# Altium PCB PCB_Base.PcbDoc
Units mm, origin at the board's own origin, x right, y up, seen from the top; angles counter-clockwise.
Board outline 290.83 x 119.38 mm, 2 copper layers (Top Layer, Bottom Layer); 6 components, 196 nets, 6 pads, 0 vias.
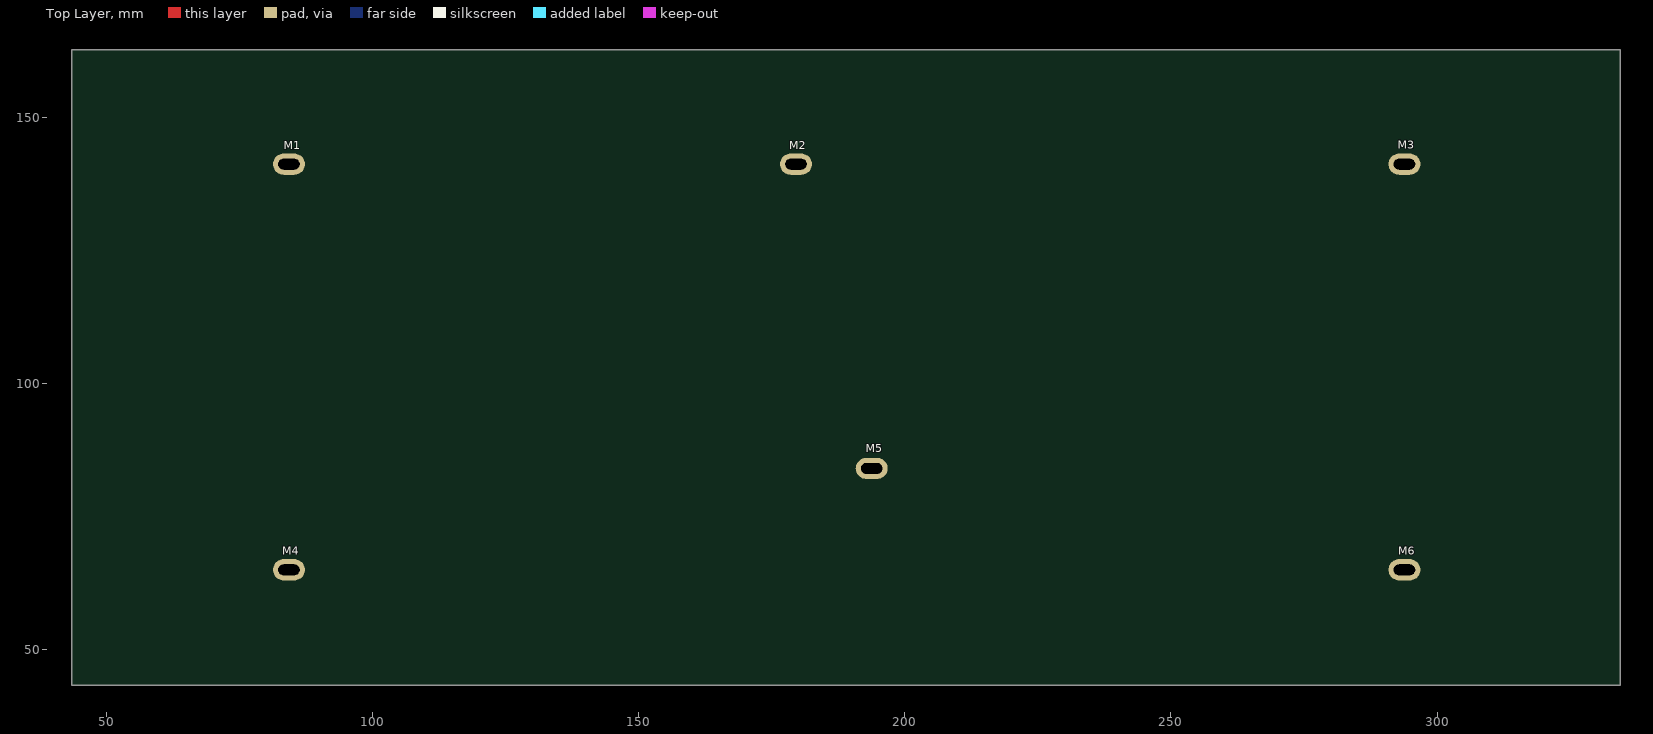
[diagram p0: Top Layer view]
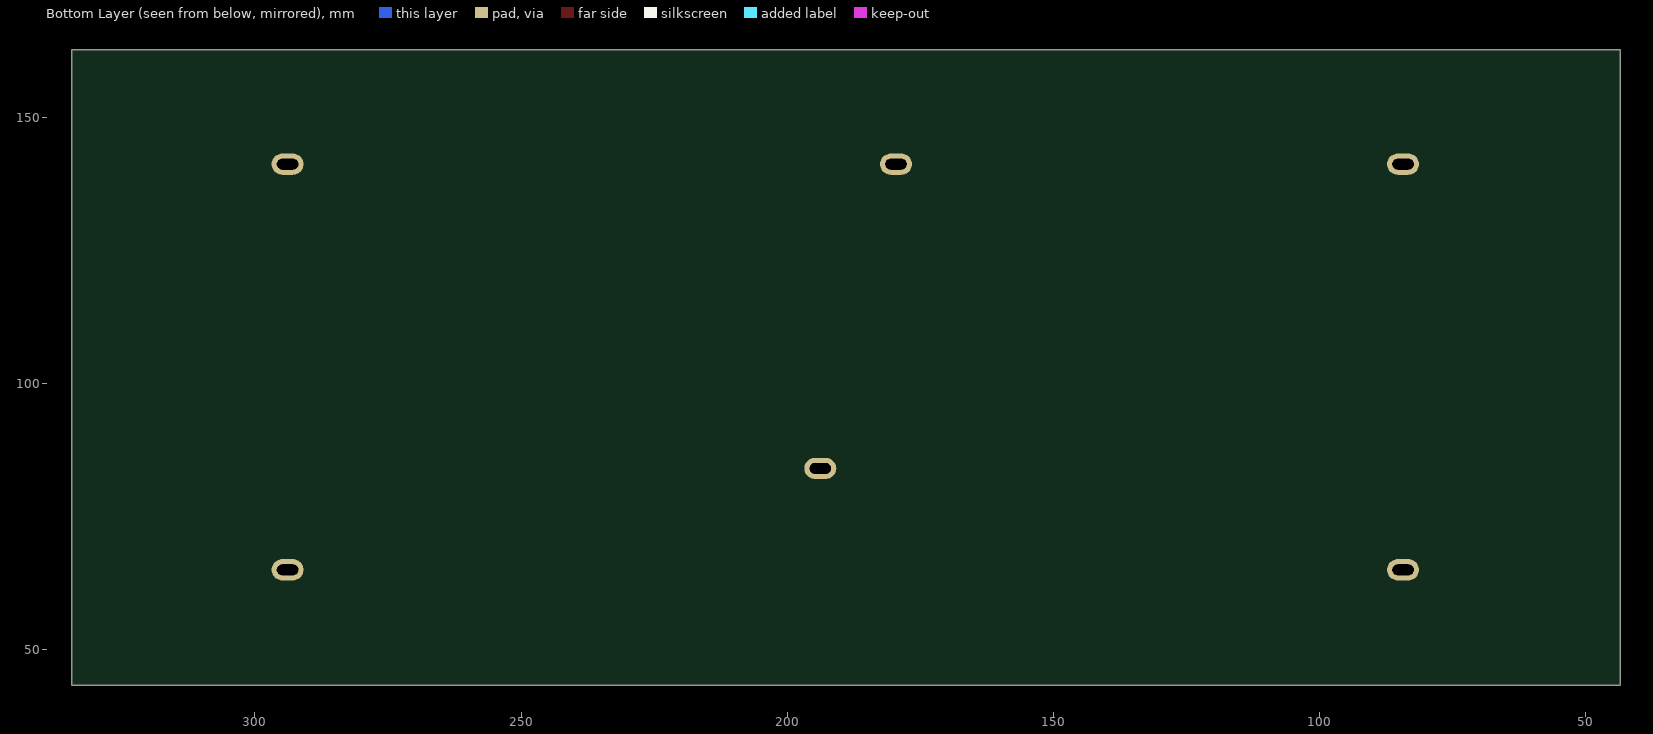
[diagram p1: Bottom Layer view, seen from below]

## Layer stack, top to bottom
Top Layer: signal copper 0.0356
Dielectric: dielectric 0.32, FR-4, Dk 4.8
Bottom Layer: signal copper 0.0356

## Board outline
43.561,162.687 43.561,43.307 334.391,43.307 334.391,162.687 43.561,162.687

## Design rules (kind name [scope] priority, off if disabled: settings)
Clearance [All] p1: gap=0.178
PolygonConnect [All] p1: connectstyle=Relief reliefconductorwidth=0.254 reliefentries=4 polygonreliefangle="90 Angle" airgapwidth=0.254
RoutingVias [All] p1: holewidth=0.711 width=1.27 viastyle="Through Hole" minholewidth=0.711 minwidth=1.27 maxholewidth=0.711 maxwidth=1.27
SilkToSolderMaskClearance SilkscreenOverComponentPads [IsPad] p1: minsilkscreentomaskgap=0.254 clearancetoexposedcopper=TRUE
SolderMaskExpansion [All] p1: expansion=0.102
Width [All] p1: maxlimit=0.381 minlimit=0.203 preferedwidth=0.254
27 further rules are at their usual default settings.

## Components (designator, comment, footprint, x,y, rotation, side; value= is the part's Value field where it differs from the comment)
M1 "M3" "M2 long" 84.328,141.224 r180 top
M2 "M3" "M2 long" 179.578,141.224 r180 top
M3 "M3" "M2 long" 293.878,141.224 r180 top
M4 "M3" "M2 long" 84.328,65.024 r180 top
M5 "M3" "M2 long" 193.802,84.074 r180 top
M6 "M3" "M2 long" 293.878,65.024 r180 top

## Footprints (in the part's own frame and the unit in brackets; to place one, negate y for a bottom-side part, rotate by r counter-clockwise, add the part's x,y. Pads: shape width x height; smd on the part's side, far side on the other; paste and mask are expansions set on the pad)
"M2 long" [mm]
  oval 6x4 hole 2 slot 4 at 0 deg: 0(0,0)

## Nets (pads, with @x,y where several pads share a name; then routed paths per layer and width w, separated by ;. In a path a pad name is that pad's centre, name@x,y a point inside that pad or via, vN(x,y) a via of type N, cw(c..) or ccw(c..) an arc to the next point about the centre after c; other vN are vias at no path point)
BL: 
CAPLED: 
D_N: 
D_P: 
GND: 
HANG1: 
HANG2: 
HANG3: 
HANG4: 
HANG5: 
HANG6: 
LED: 
LIE1: 
LIE2: 
LIE3: 
LIE4: 
LIE5: 
LIE6: 
LIE7: 
LIE8: 
LIE9: 
LIE10: 
LIE11: 
LIE12: 
LIE13: 
LIE14: 
LIE15: 
LIE16: 
LIE17: 
LIE18: 
LIE19: 
Net1,1_4: 
Net1,1_5: 
Net1,2_4: 
Net1,2_5: 
Net1,3_4: 
Net1,3_5: 
Net1,4_4: 
Net1,4_5: 
Net1,5_4: 
Net1,5_5: 
Net1,6_4: 
Net1,6_5: 
Net1,7_4: 
Net1,7_5: 
Net1,8_4: 
Net1,8_5: 
Net1,9_4: 
Net1,9_5: 
Net1,10_4: 
Net1,10_5: 
Net1,11_4: 
Net1,11_5: 
Net1,12_4: 
Net1,12_5: 
Net1,13_4: 
Net1,13_5: 
Net1,14_4: 
Net1,14_5: 
Net1,15_4: 
Net1,15_5: 
Net2,1_4: 
Net2,1_5: 
Net2,2_4: 
Net2,2_5: 
Net2,3_4: 
Net2,3_5: 
Net2,4_4: 
Net2,4_5: 
Net2,5_4: 
Net2,5_5: 
Net2,6_4: 
Net2,6_5: 
Net2,7_4: 
Net2,7_5: 
Net2,8_4: 
Net2,8_5: 
Net2,9_4: 
Net2,9_5: 
Net2,10_4: 
Net2,10_5: 
Net2,11_4: 
Net2,11_5: 
Net2,12_4: 
Net2,12_5: 
Net2,13_4: 
Net2,13_5: 
Net2,15_4: 
Net2,15_5: 
Net3,1_4: 
Net3,1_5: 
Net3,2_4: 
Net3,2_5: 
Net3,3_4: 
Net3,3_5: 
Net3,4_4: 
Net3,4_5: 
Net3,5_4: 
Net3,5_5: 
Net3,6_4: 
Net3,6_5: 
Net3,7_4: 
Net3,7_5: 
Net3,8_4: 
Net3,8_5: 
Net3,9_4: 
Net3,9_5: 
Net3,10_4: 
Net3,10_5: 
Net3,11_4: 
Net3,11_5: 
Net3,12_4: 
Net3,12_5: 
Net3,13_4: 
Net3,13_5: 
Net3,15_4: 
Net3,15_5: 
Net4,1_4: 
Net4,1_5: 
Net4,2_4: 
Net4,2_5: 
Net4,3_4: 
Net4,3_5: 
Net4,4_4: 
Net4,4_5: 
Net4,5_4: 
Net4,5_5: 
Net4,6_4: 
Net4,6_5: 
Net4,7_4: 
Net4,7_5: 
Net4,8_4: 
Net4,8_5: 
Net4,9_4: 
Net4,9_5: 
Net4,10_4: 
Net4,10_5: 
Net4,11_4: 
Net4,11_5: 
Net4,12_4: 
Net4,12_5: 
Net4,14_4: 
Net4,14_5: 
Net5,1_4: 
Net5,1_5: 
Net5,2_4: 
Net5,2_5: 
Net5,3_4: 
Net5,3_5: 
Net5,4_4: 
Net5,4_5: 
Net5,5_4: 
Net5,5_5: 
Net5,6_4: 
Net5,6_5: 
Net5,7_4: 
Net5,7_5: 
Net5,8_4: 
Net5,8_5: 
Net5,9_4: 
Net5,9_5: 
Net5,10_4: 
Net5,10_5: 
Net5,11_4: 
Net5,11_5: 
Net5,12_4: 
Net5,12_5: 
Net5,14_4: 
Net5,14_5: 
Net5,15_4: 
Net5,15_5: 
Net6,1_4: 
Net6,1_5: 
Net6,2_4: 
Net6,2_5: 
Net6,3_4: 
Net6,3_5: 
Net6,4_4: 
Net6,4_5: 
Net6,5_4: 
Net6,5_5: 
Net6,8_4: 
Net6,8_5: 
Net6,10_4: 
Net6,10_5: 
Net6,12_4: 
Net6,12_5: 
Net6,14_4: 
Net6,14_5: 
Net6,15_4: 
Net6,15_5: 
NetQ1_1: 
NUMLED: 
RGBLED: 
RST: 
SHIELD: 
pads on no net: M1.0 M2.0 M3.0 M4.0 M5.0 M6.0

## Silkscreen, mask and mechanical layers (free items; w line width, h text height)
Mechanical 2:
  drawing of 1844 lines, arcs and shapes, not listed